# Altium PCB Slaves_Testbench.PcbDoc
Units mil, origin at the board's own origin, x right, y up, seen from the top; angles counter-clockwise.
Board outline 5595 x 1250 mil, 2 copper layers (Top Layer, Bottom Layer); 15 components, 14 nets, 55 pads, 0 vias.
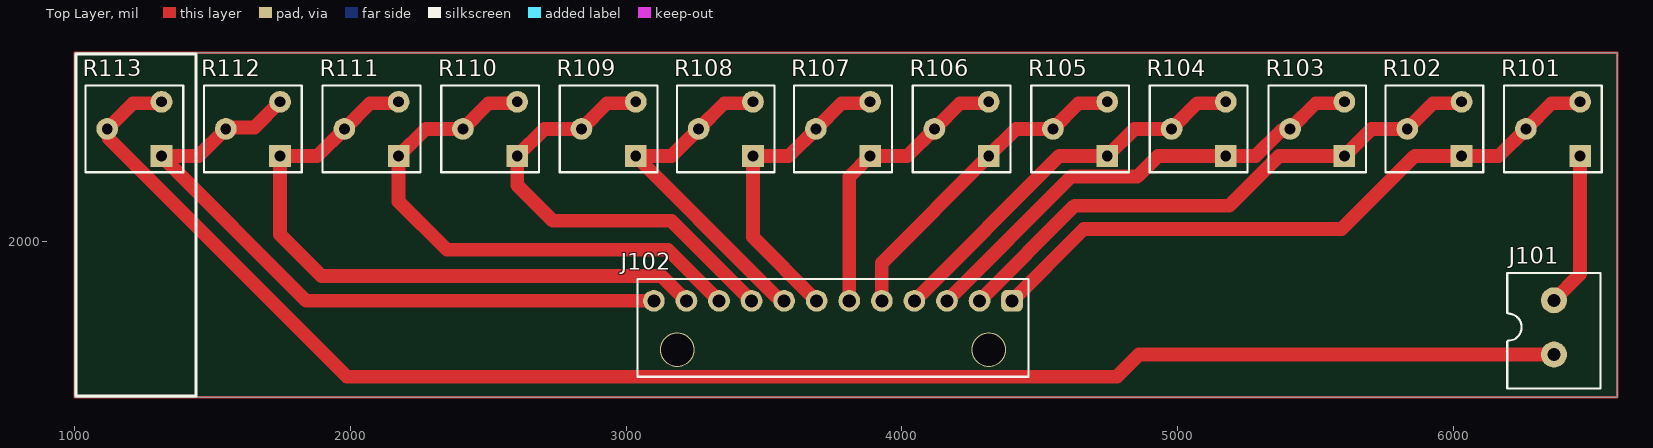
[diagram p0: Top Layer view]
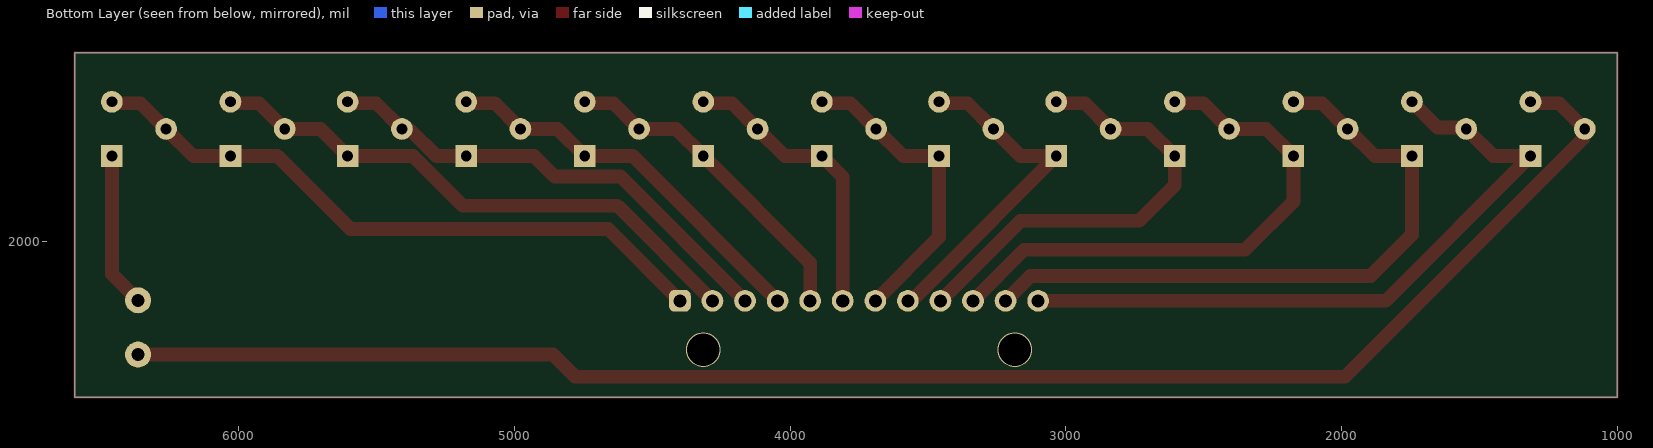
[diagram p1: Bottom Layer view, seen from below]
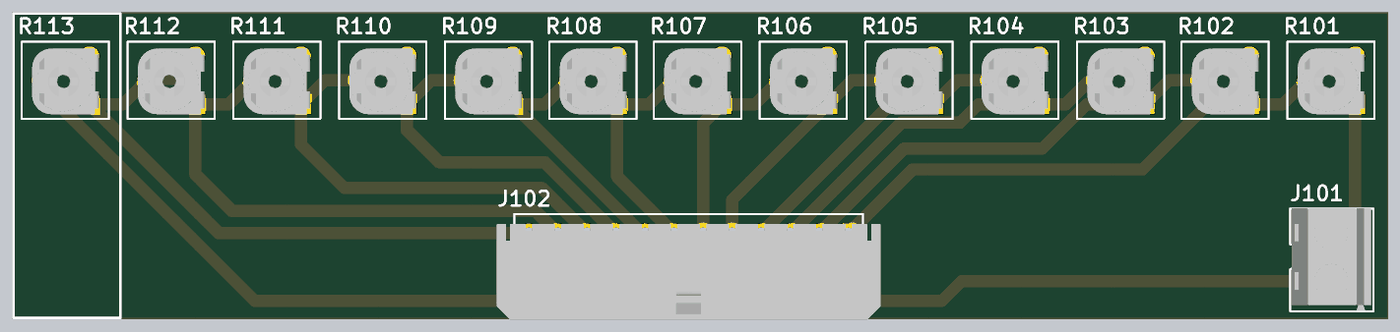
[diagram p2: 3D render of the assembled board from above, using the file's embedded part models]

## Layer stack, top to bottom
Top Solder: solder mask 0.4, Solder Resist, Dk 3.5
Top Layer: signal copper 1.4
Dielectric 1: dielectric 12.6, FR-4, Dk 4.8
Bottom Layer: signal copper 1.4
Bottom Solder: solder mask 0.4, Solder Resist, Dk 3.5

## Board outline
1000,1435 1000,2685 6595,2685 6595,1435

## Design rules (kind name [scope] priority, off if disabled: settings)
Clearance [All] p1: gap=10 ignorepadtopadclearanceinfootprint=FALSE except(0: Arc-Hole Track-Hole SMDPad-Hole THPad-Hole Via-Hole Fill-Hole Poly-Hole Region-Hole Text-Hole)
PolygonConnect [All] p1: connectstyle=Relief reliefconductorwidth=10 reliefentries=4 polygonreliefangle="90 Angle" airgapwidth=10
RoutingVias [All] p1: holewidth=28 width=50 viastyle="Through Hole" minholewidth=28 minwidth=50 maxholewidth=28 maxwidth=50
SolderMaskExpansion [All] p1: expansion=4 istentingtop=FALSE
Width [All] p1: maxlimit=100 minlimit=10 preferedwidth=25 minimp=50.000000 maximp=50.000000 favimp=50.000000
30 further rules are at their usual default settings.

## Classes and differential pairs
component class Slaves_Testbench: J102 R101 R102 R103 R104 R105 R106 R107 R108 R109 R110 R111 R112 R113

## Components (designator, comment, footprint, x,y, rotation, side; value= is the part's Value field where it differs from the comment)
J101 "282836-2" J_screw_1x2 6365,1786.85 r90 top
J102 "436501200" J_MicroFit_1x12 3750.28,1627.52 r0 top
R101 "R1k-VTR_RM065" R-VTR_RM065 6263.15,2408.43 r0 top
R102 "R1k-VTR_RM065" R-VTR_RM065 5833.15,2408.43 r0 top
R103 "R1k-VTR_RM065" R-VTR_RM065 5408.15,2408.43 r0 top
R104 "R1k-VTR_RM065" R-VTR_RM065 4978.15,2408.43 r0 top
R105 "R1k-VTR_RM065" R-VTR_RM065 4548.15,2408.43 r0 top
R106 "R1k-VTR_RM065" R-VTR_RM065 4118.15,2408.43 r0 top
R107 "R1k-VTR_RM065" R-VTR_RM065 3688.15,2408.43 r0 top
R108 "R1k-VTR_RM065" R-VTR_RM065 3263.15,2408.43 r0 top
R109 "R1k-VTR_RM065" R-VTR_RM065 2838.15,2408.43 r0 top
R110 "R1k-VTR_RM065" R-VTR_RM065 2408.15,2408.43 r0 top
R111 "R1k-VTR_RM065" R-VTR_RM065 1978.15,2408.43 r0 top
R112 "R1k-VTR_RM065" R-VTR_RM065 1548.15,2408.43 r0 top
R113 "R10k-VTR_RM065" R-VTR_RM065 1118.15,2408.43 r0 top

## Footprints (in the part's own frame and the unit in brackets; to place one, negate y for a bottom-side part, rotate by r counter-clockwise, add the part's x,y. Pads: shape width x height; smd on the part's side, far side on the other; paste and mask are expansions set on the pad)
J_MicroFit_1x12 [mm]
  rrect50% 2x2 hole 1.2: 1(16.5,4)
  round 2 hole 1.2: 2(13.5,4) 3(10.5,4) 4(7.5,4) 5(4.5,4) 6(1.5,4) 7(-1.5,4) 8(-4.5,4) 9(-7.5,4) 10(-10.5,4) 11(-13.5,4) 12(-16.5,4)
  round 3.2 hole 3: ""(-14.35,-0.5) ""(14.35,-0.5)
  silkscreen extent -18,-3 18,6, body extent -19.82,-4.96 19.83,4.94, height 5.64
J_screw_1x2 [mm]
  round 2.4 hole 1.2: 1(-5,0) 2(0,0)
  silkscreen extent -8.13,-4.3 2.5,4.3, body extent -8.08,-4.05 2.52,4.15, height 10
R-VTR_RM065 [mm]
  rect 2x2 hole 1: 1(5,-2.5)
  round 2 hole 1: 2(0,0) 3(5,2.5)
  silkscreen extent -2,-4 7,4, body extent -0.93,-3.52 5.95,3.28, height 9.44

## Part data
J101: library part J_CON2x1, "Connector, Terminal Block; Wire Receptacle; 2 Pos.; 16-30 AWG; 0.197 in. CL; Sid", Manufacturer 1="TE Connectivity", Category="Terminal Blocks", ComponentLink1Description=https://datasheet.ciiva.com/15169/getdatasheetpartid-155855-15169553.pdf?src-supplier=Verical, ComponentLink1URL=https://datasheet.ciiva.com/15169/getdatasheetpartid-155855-15169553.pdf?src-supplier=Verical, ComponentLink2Description=https://datasheet.ciiva.com/16393/282836-2-16393382.pdf?src-supplier=Future+Electronics, ComponentLink2URL=https://datasheet.ciiva.com/16393/282836-2-16393382.pdf?src-supplier=Future+Electronics, ComponentLink3Description=https://datasheet.ciiva.com/11757/0900766b8002dc8a-11757385.pdf?src-supplier=RSComponents, ComponentLink3URL=https://datasheet.ciiva.com/11757/0900766b8002dc8a-11757385.pdf?src-supplier=RSComponents, ComponentLink4Description=https://datasheet.ciiva.com/7628/1731782-7628513.pdf?src-supplier=Element14, ComponentLink4URL=https://datasheet.ciiva.com/7628/1731782-7628513.pdf?src-supplier=Element14, ComponentLink5Description=https://datasheet.ciiva.com/823/eng-cd-282836-h10-823437.pdf?src-supplier=Digi-Key, ComponentLink5URL=https://datasheet.ciiva.com/823/eng-cd-282836-h10-823437.pdf?src-supplier=Digi-Key, ComponentLink6Description=https://datasheet.ciiva.com/3141/eng-cs-1308389-eurostyle-terminal-blocks-0607-3141118.pdf?src-supplier=Avnet, ComponentLink6URL=https://datasheet.ciiva.com/3141/eng-cs-1308389-eurostyle-terminal-blocks-0607-3141118.pdf?src-supplier=Avnet, ComponentLink7Description=https://datasheet.ciiva.com/30261/eng-cs-1308389-eurostyle-terminal-blocks-0607-30261813.pdf?src-supplier=Onlinecomponents.com, ComponentLink7URL=https://datasheet.ciiva.com/30261/eng-cs-1308389-eurostyle-terminal-blocks-0607-30261813.pdf?src-supplier=Onlinecomponents.com, Manufacturer Part Number 1=282836-2, Pricing 1="1=0,41710, 10=0,36230, 100=0,30770, 500=0,29220, 1000=0,26130, 2500=0,23640, 5000=0,21140, 10000=0,20690, 25000=0,20320 (USD)", RoHS=Yes, Stock 1=8391, Supplier 1="Arrow Electronics", Supplier Part Number 1=282836-2
J102: library part J_MicroFit_1x12, "Conn Power HDR 12 POS 3mm Solder RA Thru-Hole 12 Terminal 1 Port Micro-Fit 3.0™ Frame", Manufacturer 1=Molex, Manufacturer Part Number 1=43650-1200, Supplier Part Number 1=01AH1239, .Creator=DR, Category="Headers and Wire Housings", ComponentLink1Description=https://datasheet.ciiva.com/713/436500501-sd-713883.pdf?src-supplier=Digi-Key, ComponentLink1URL=https://datasheet.ciiva.com/713/436500501-sd-713883.pdf?src-supplier=Digi-Key, ComponentLink2Description=https://datasheet.ciiva.com/30240/0436501200-pcb-headers-30240499.pdf?src-supplier=Onlinecomponents.com, ComponentLink2URL=https://datasheet.ciiva.com/30240/0436501200-pcb-headers-30240499.pdf?src-supplier=Onlinecomponents.com, ComponentLink3Description=https://datasheet.ciiva.com/5150/0436501200-pcb-headers-168537-5150117.pdf?src-supplier=Mouser, ComponentLink3URL=https://datasheet.ciiva.com/5150/0436501200-pcb-headers-168537-5150117.pdf?src-supplier=Mouser, ComponentLink4Description=https://datasheet.ciiva.com/16086/1031430436501200-pcb-headers-16086097.pdf?src-supplier=Onlinecomponents.com, ComponentLink4URL=https://datasheet.ciiva.com/16086/1031430436501200-pcb-headers-16086097.pdf?src-supplier=Onlinecomponents.com, ComponentLink5Description=https://datasheet.ciiva.com/14155/04402066-14155230.pdf?src-supplier=Distrelec, ComponentLink5URL=https://datasheet.ciiva.com/14155/04402066-14155230.pdf?src-supplier=Distrelec, Pricing 1="1=3,36000, 10=2,96000, 25=2,76000, 50=2,56000, 100=2,36000, 250=2,08000 (USD)", RoHS=Yes, Stock 1=13, Supplier 1=Newark
R101 R102 R103 R104 R105 R106 R107 R108 R109 R110 R111 R112: "Generic RM065 1k trimmer", Resistance=1kR
R113: "Generic RM065 1k trimmer", Resistance=10kR

## Nets (pads, with @x,y where several pads share a name; then routed paths per layer and width w, separated by ;. In a path a pad name is that pad's centre, name@x,y a point inside that pad or via, vN(x,y) a via of type N, cw(c..) or ccw(c..) an arc to the next point about the centre after c; other vN are vias at no path point)
+60: J101.2 R101.1 | length 562.5
  Top Layer w50: J101.2 6460,1881.85 R101.1
GND: J101.1 R113.2 R113.3 | length 5869.8
  Top Layer w50: R113.2 1211.08,2501.35 1309.5,2501.35 R113.3 ; R113.2@1123.65,2373.11 1986.92,1509.84 4779.84,1509.84 4860,1590 J101.1
NetJ102_1: J102.1 R101.2 R101.3 R102.1 | length 2359.1
  Top Layer w50: J102.1 4659.88,2045 5595,2045 5860,2310 R102.1 6164.72,2310 R101.2 6356.08,2501.35 6454.5,2501.35 R101.3
NetJ102_2: J102.2 R102.2 R102.3 R103.1 | length 2047.2
  Top Layer w50: J102.2 4626.77,2130 5187.81,2130 5367.81,2310 R103.1 5703.43,2408.43 R102.2 5926.08,2501.35 6024.5,2501.35 R102.3
NetJ102_3: J102.3 R103.2 R103.3 R104.1 | length 1705.8
  Top Layer w50: J102.3 4614.29,2235.63 4854.16,2235.63 4928.53,2310 R104.1 5282.96,2310 R103.2@5375.89,2402.93 ; R103.2 5501.08,2501.35 5599.5,2501.35 R103.3
NetJ102_4: J102.4 R104.2 R104.3 R105.1 | length 1428.4
  Top Layer w50: J102.4 4570.55,2310 R105.1 4843.43,2408.43 R104.2 5071.08,2501.35 5169.5,2501.35 R104.3
NetJ102_5: J102.5 R105.2 R105.3 R106.1 | length 1197.1
  Top Layer w50: J102.5 3927.44,1922.44 R106.1 4413.43,2408.43 R105.2 4641.08,2501.35 4739.5,2501.35 R105.3
NetJ102_6: J102.6 R106.2 R106.3 R107.1 | length 1067.9
  Top Layer w50: J102.6 3809.33,2234.33 R107.1 4019.72,2310 R106.2 4211.08,2501.35 4309.5,2501.35 R106.3
NetJ102_7: J102.7 R107.2 R107.3 R108.1 | length 1127.3
  Top Layer w50: J102.7 3460,2016.22 R108.1 3589.72,2310 R107.2 3781.08,2501.35 3879.5,2501.35 R107.3
NetJ102_8: J102.8 R108.2 R108.3 R109.1 | length 1262.1
  Top Layer w50: R108.3 3454.5,2501.35 3356.08,2501.35 R108.2 3164.72,2310 R109.1 3485.63,1859.37 3485.81,1859.37 3545.81,1799.37 3550.96,1799.37 3565.33,1785 J102.8
NetJ102_9: J102.9 R109.2 R109.3 R110.1 | length 1640.5
  Top Layer w50: R109.3 3029.5,2501.35 2931.08,2501.35 R109.2 2703.43,2408.43 R110.1 2605,2205 2735,2075 3165,2075 J102.9
NetJ102_10: J102.10 R110.2 R110.3 R111.1 | length 1987.5
  Top Layer w50: R110.3 2599.5,2501.35 2501.08,2501.35 R110.2 2273.43,2408.43 R111.1 2175,2145 2350,1970 3151.89,1970 J102.10
NetJ102_11: J102.11 R111.2 R111.3 R112.1 | length 2369.7
  Top Layer w50: R111.3 2169.5,2501.35 2071.08,2501.35 R111.2 1879.72,2310 R112.1 1745,2025 1895,1875 3128.78,1875 J102.11
NetJ102_12: J102.12 R112.2 R112.3 R113.1 | length 2514.7
  Top Layer w50: R112.3 1652.07,2413.92 1553.65,2413.92 R112.2 1449.72,2310 R113.1 1840,1785 J102.12
pads on no net: J102.
copper on no net: | length 13690
  Top Layer w10: 1000,1435 6595,1435 6595,2685 1000,2685 1000,1435

## Silkscreen, mask and mechanical layers (free items; w line width, h text height)
Top Overlay:
  lines w10: 1005,1440 1440,1440 1440,2680 1005,2680 1005,1440